# Altium PCB oscilloscope_ext.PcbDoc
Units mm, origin at the board's own origin, x right, y up, seen from the top; angles counter-clockwise.
Board outline 78 x 61 mm, 4 copper layers (Top Layer, Int1 (GND), Int2 (PWR), Bottom Layer), stack 1.585 mm thick; 61 components, 81 nets, 226 pads, 66 vias.
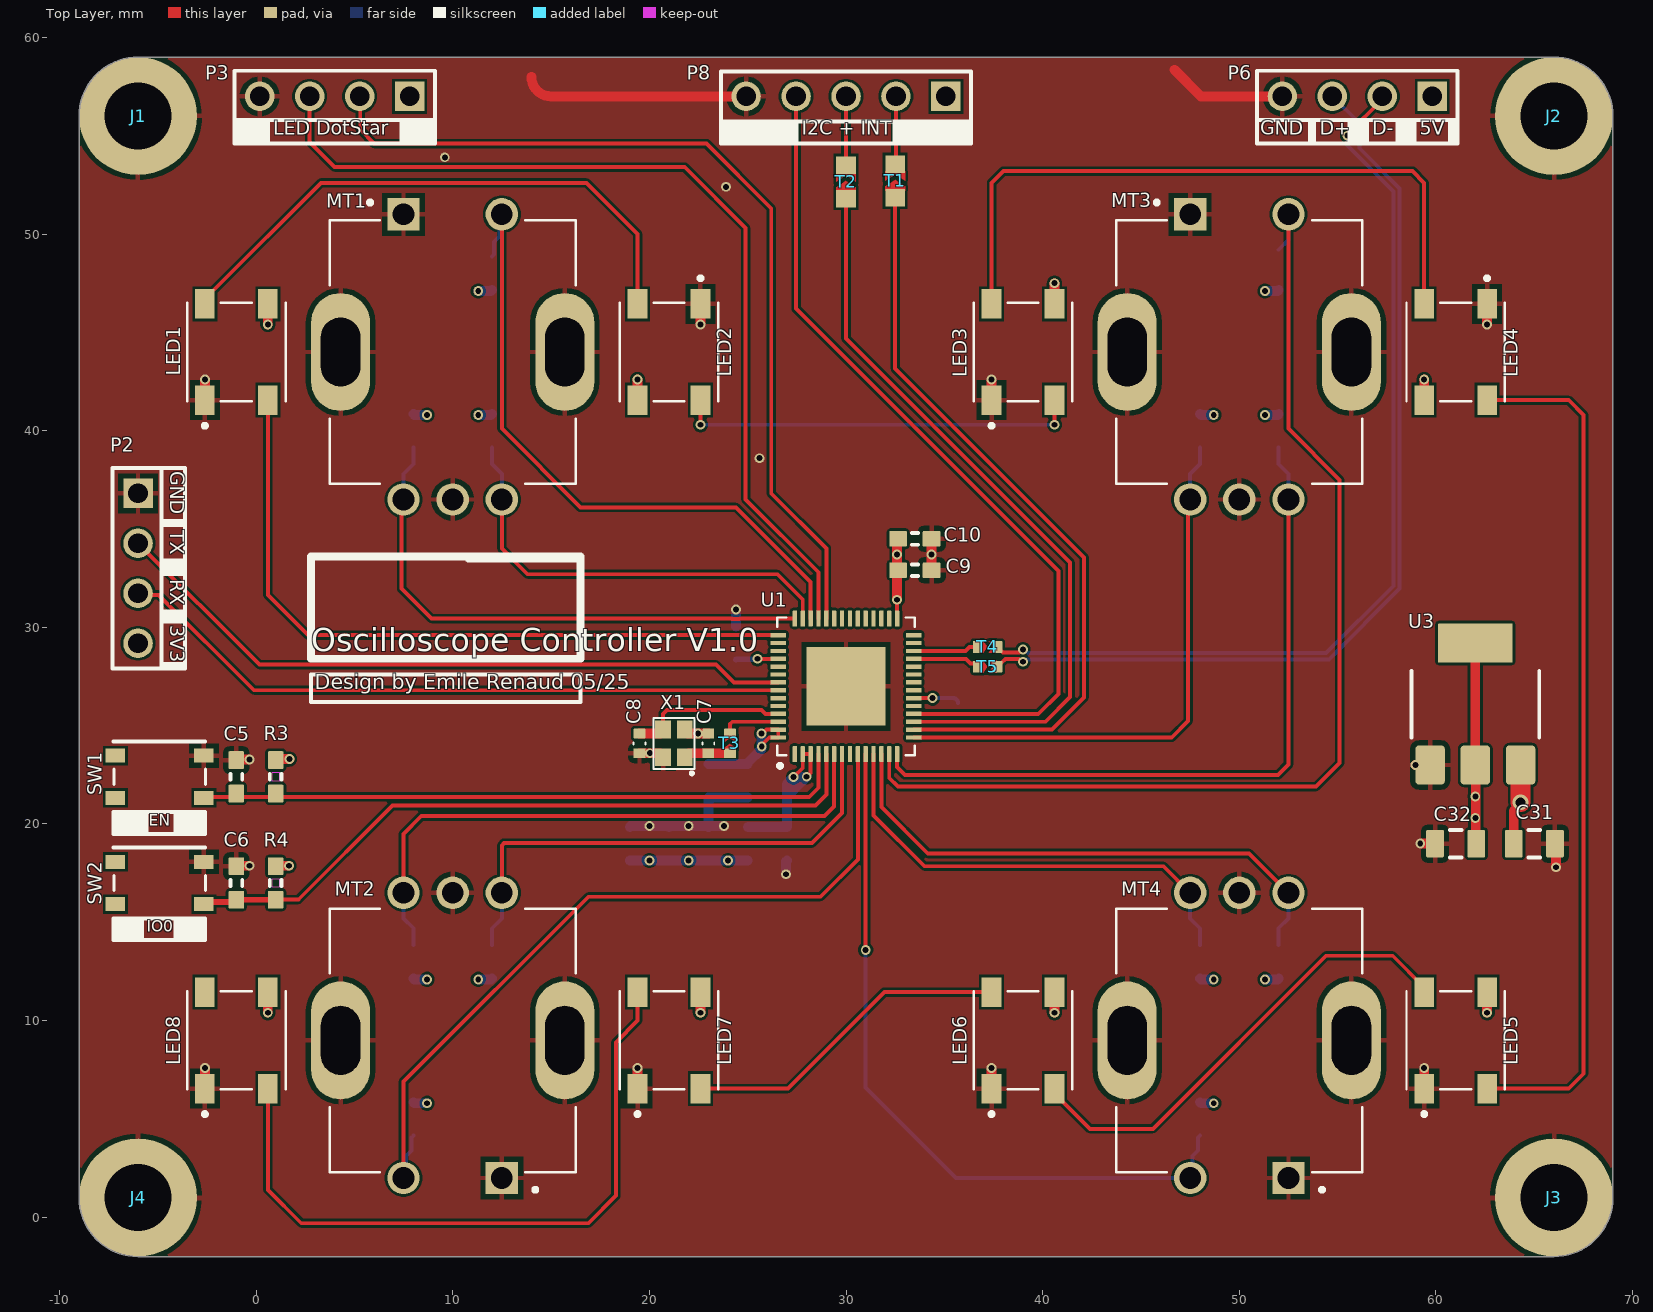
[diagram p0: Top Layer view]
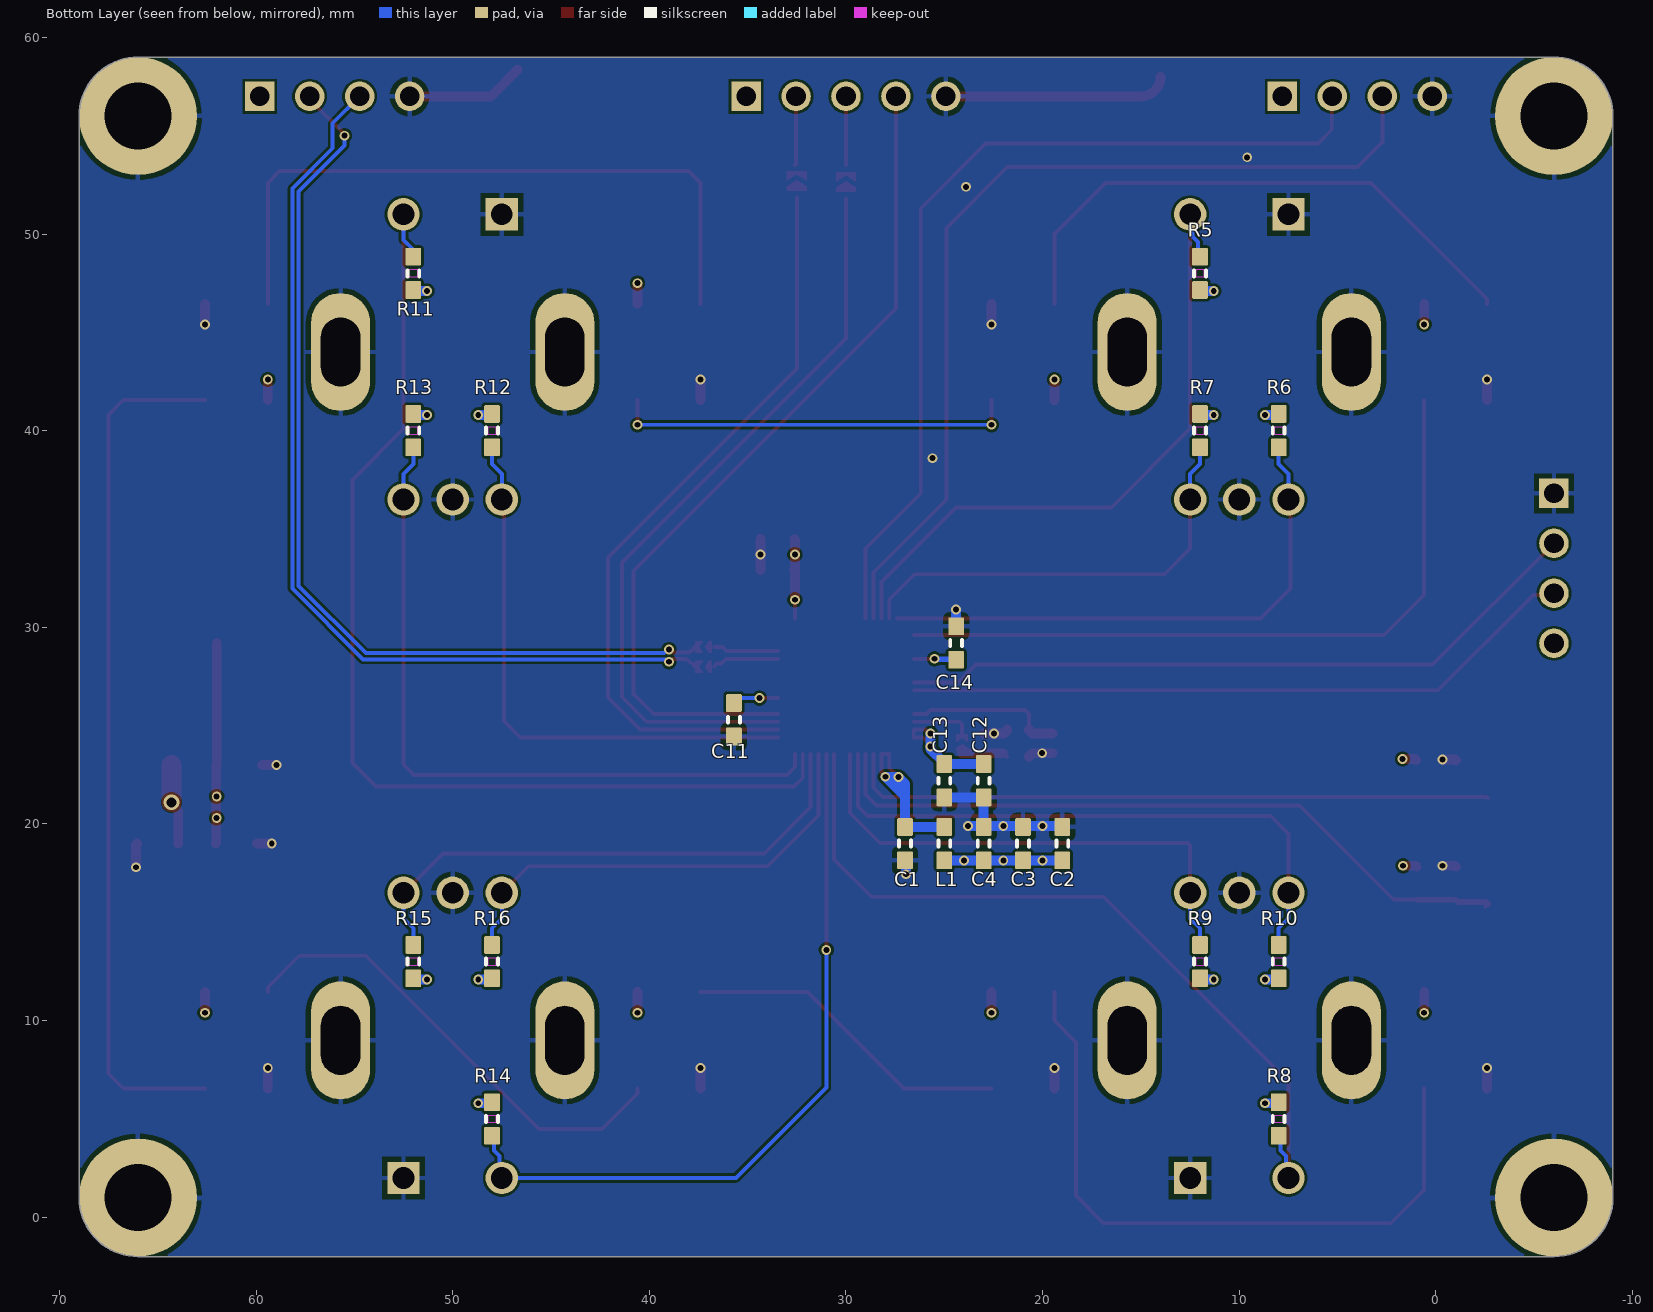
[diagram p1: Bottom Layer view, seen from below]
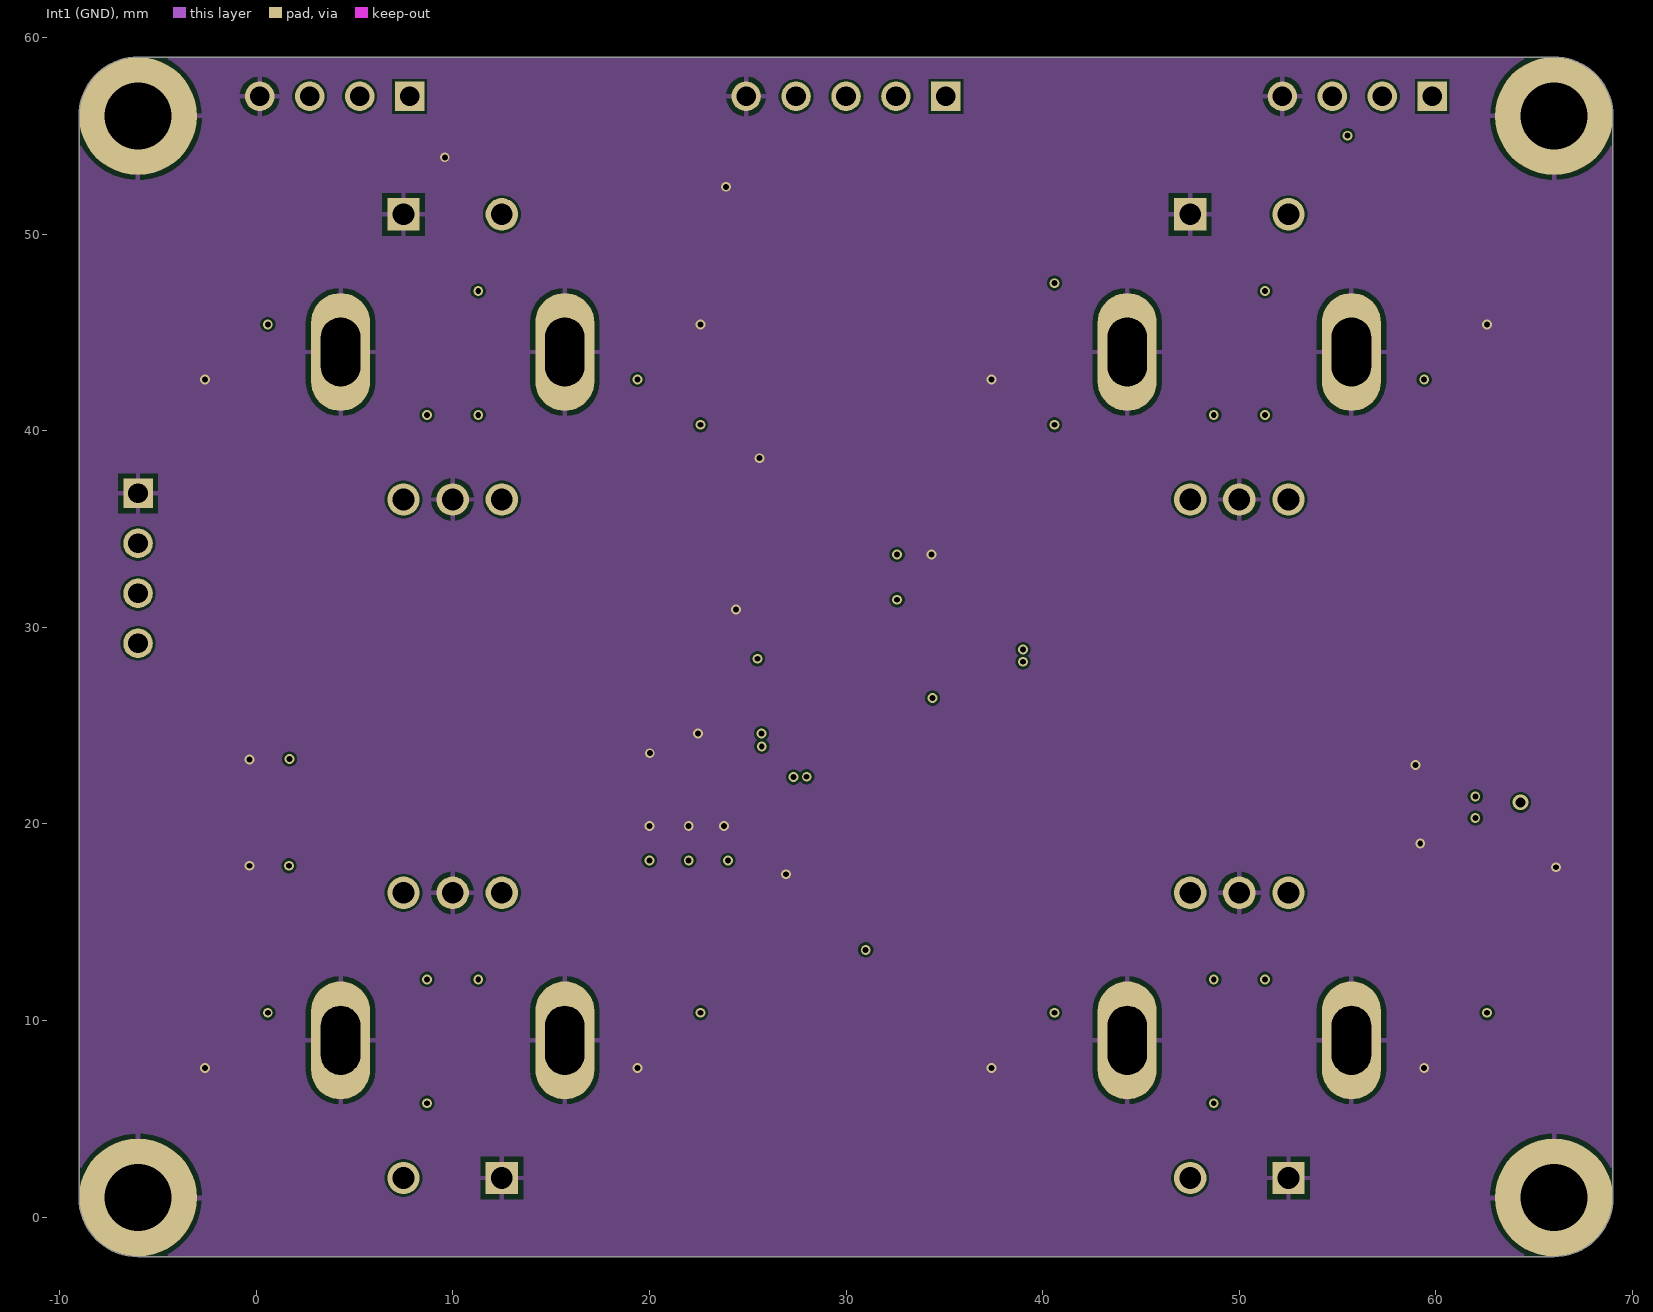
[diagram p2: Int1 (GND)]
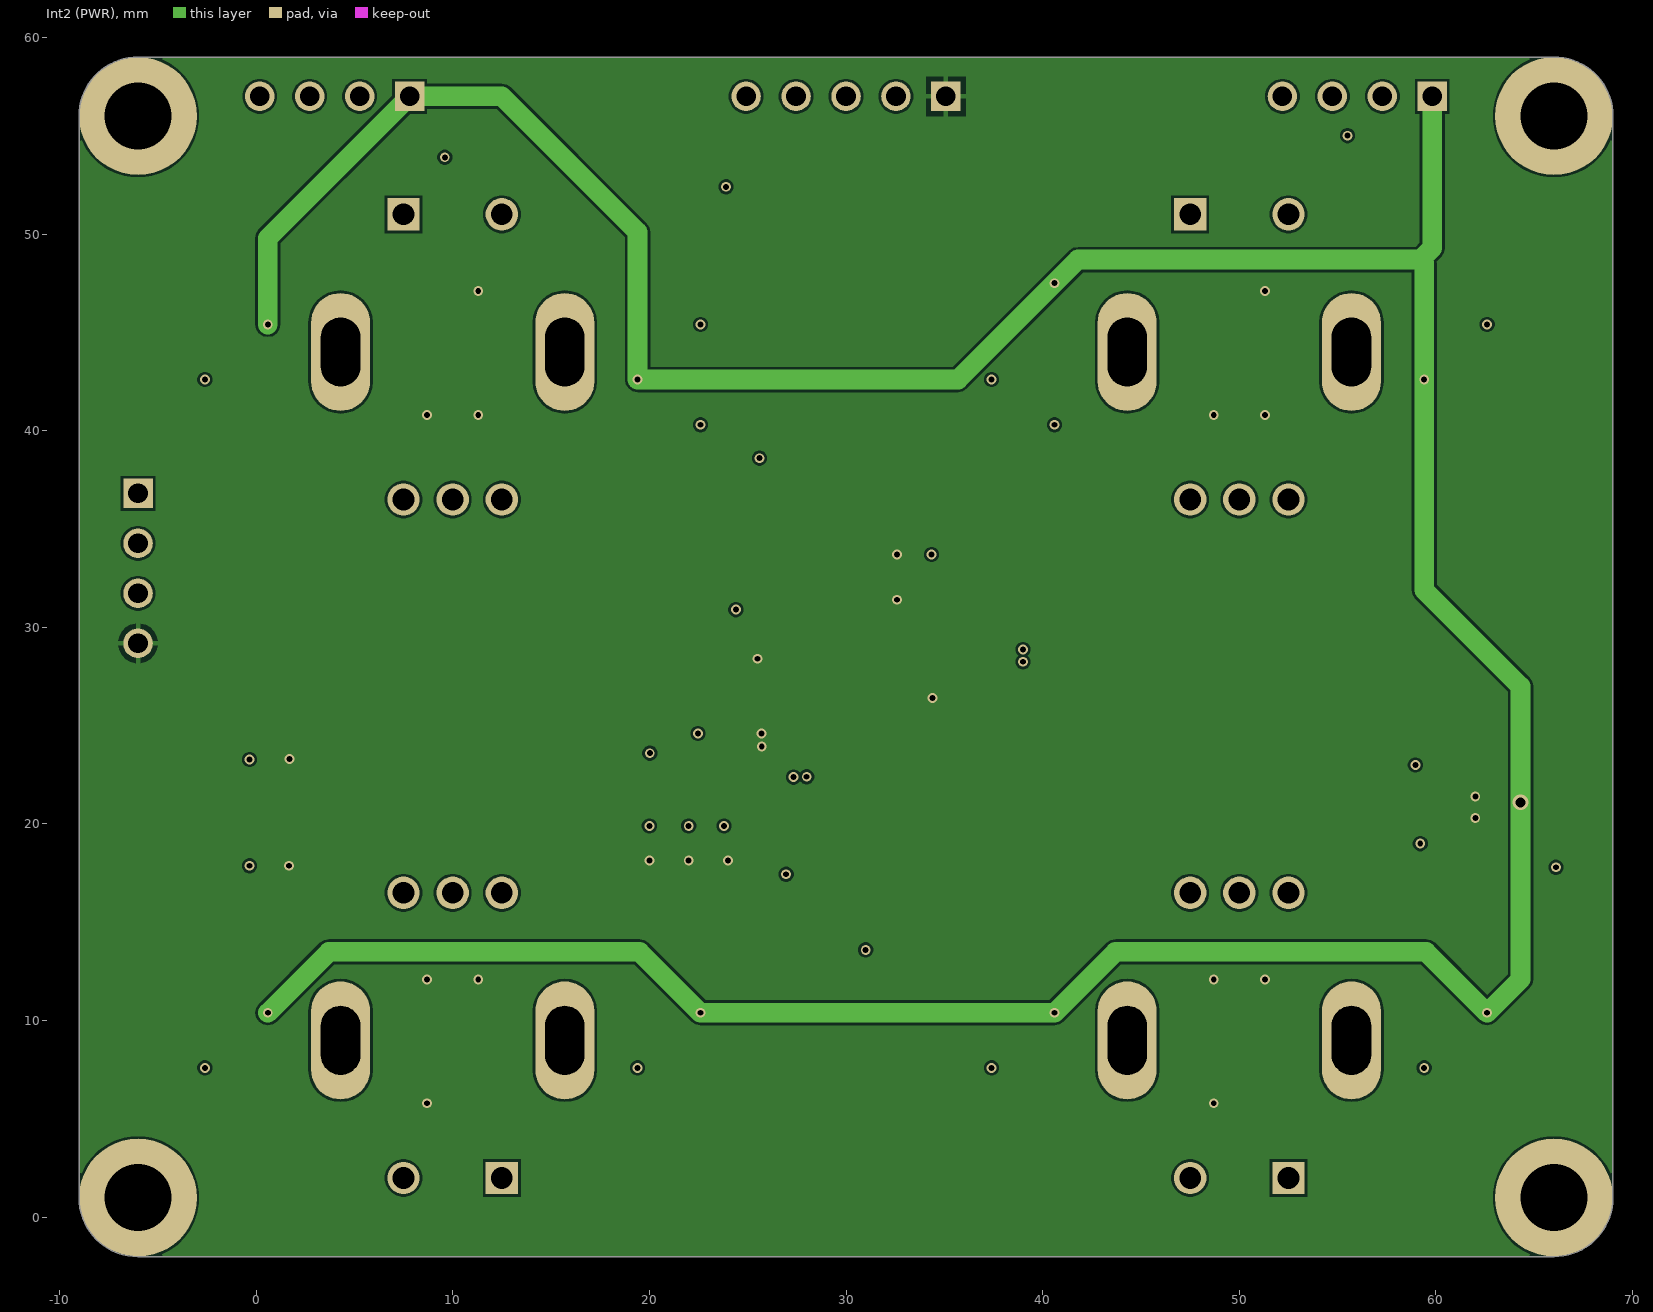
[diagram p3: Int2 (PWR)]
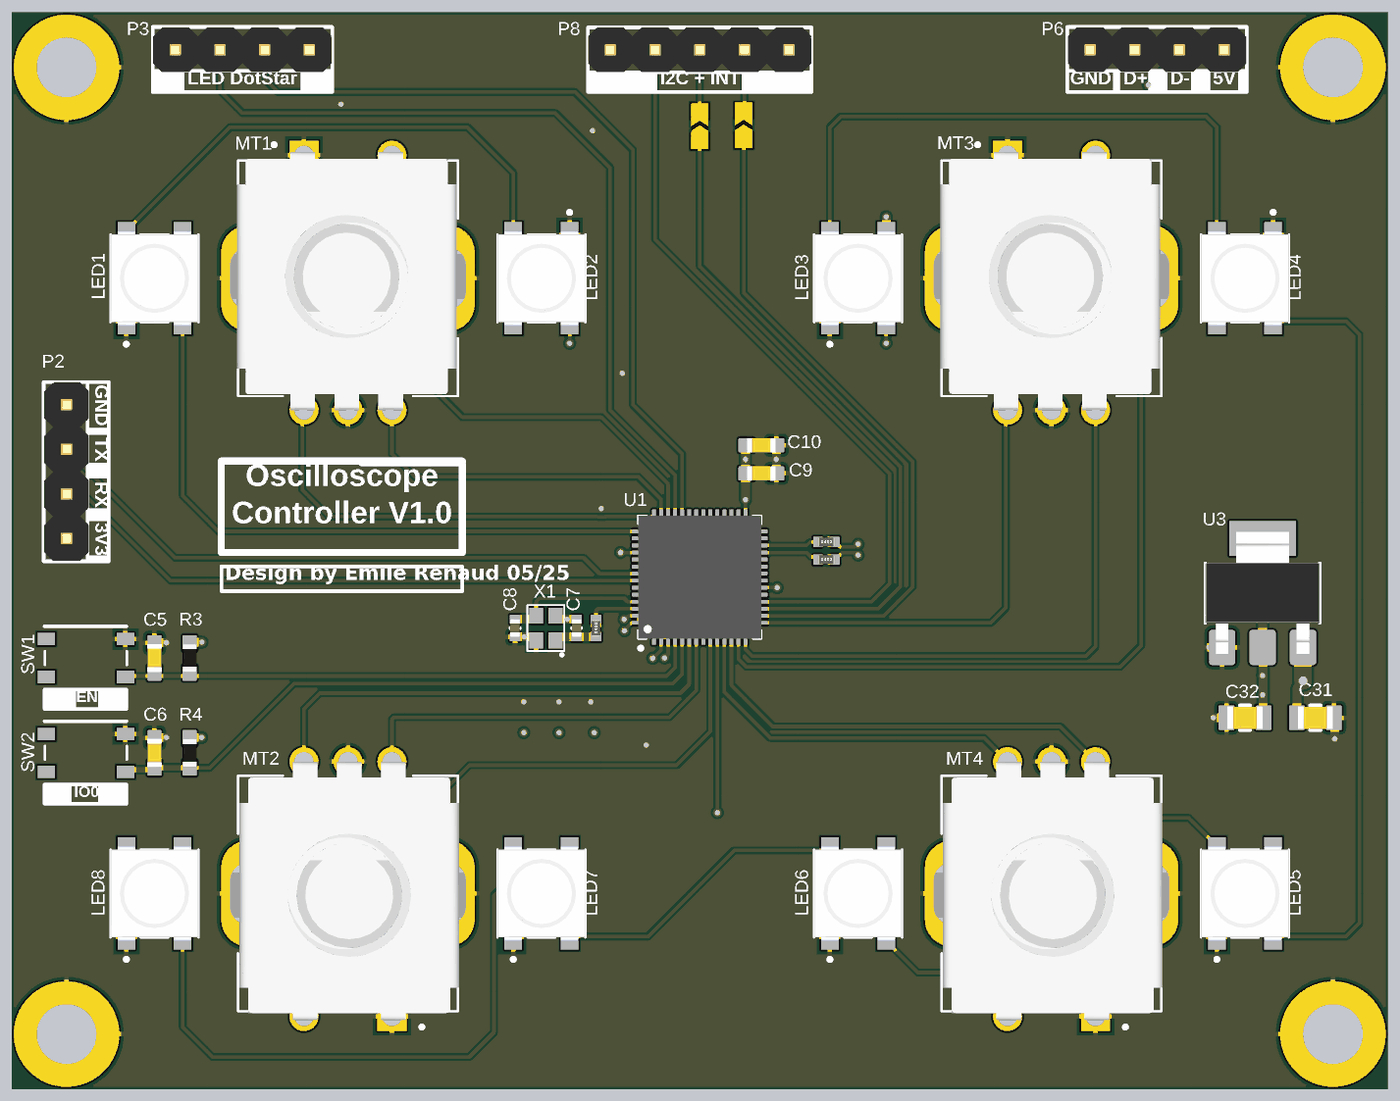
[diagram p4: 3D render of the assembled board from above, using the file's embedded part models]
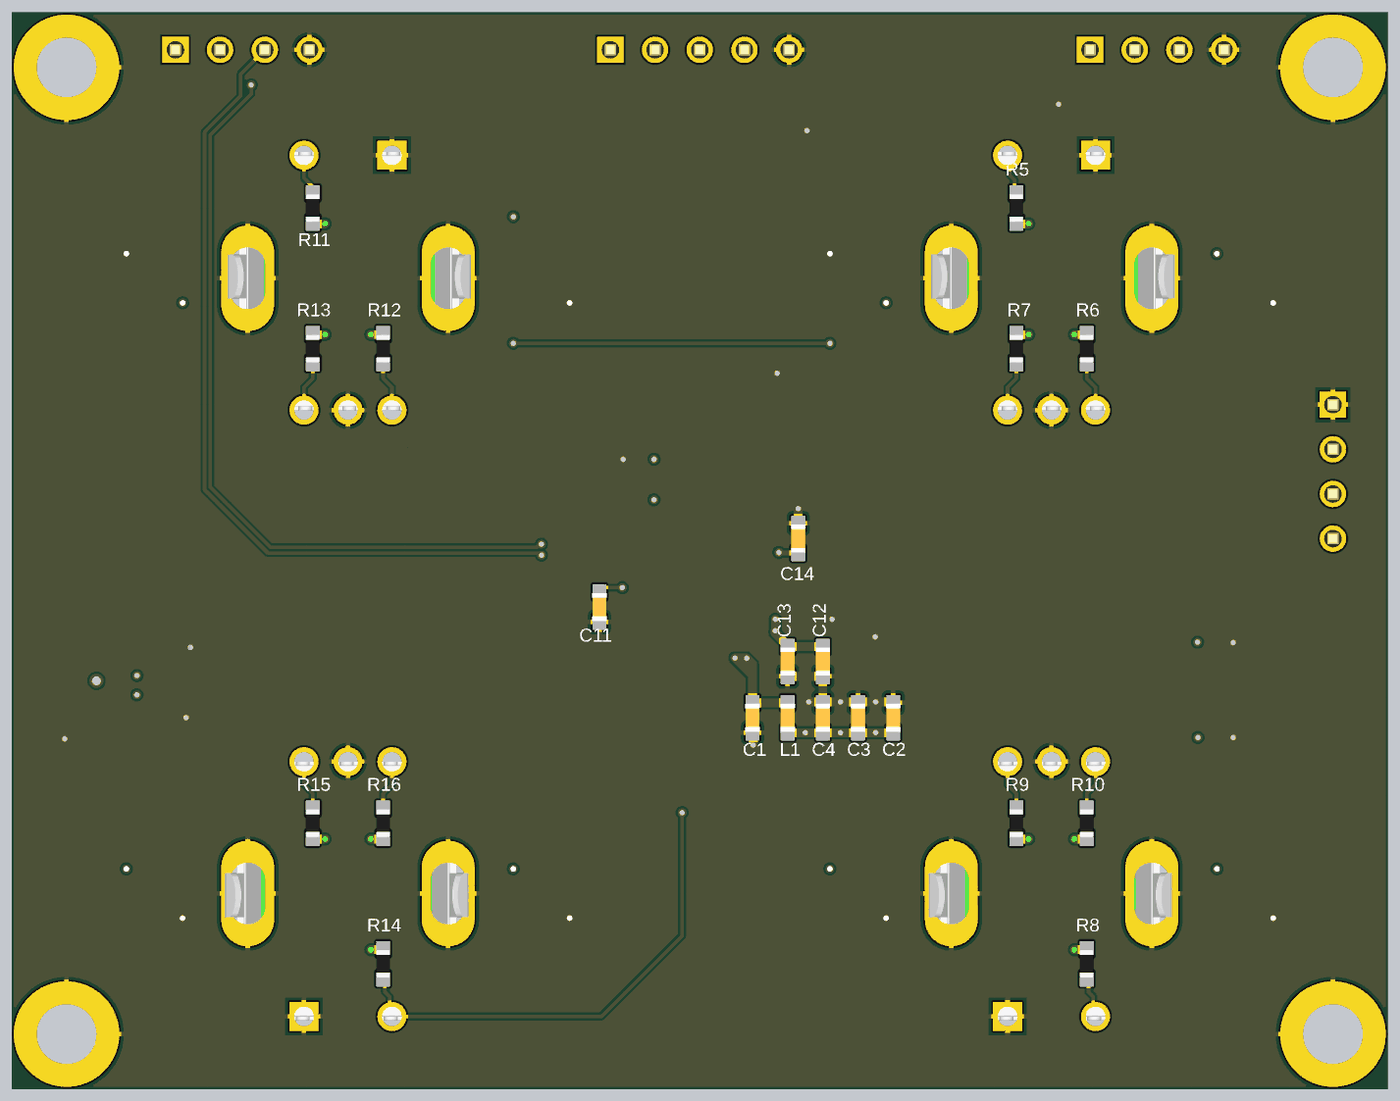
[diagram p5: 3D render of the assembled board from below, using the file's embedded part models]

## Layer stack, top to bottom
Top Solder: solder mask 0.035, SM-001, Dk 4
Top Layer: signal copper 0.035
Dielectric 2: prepreg 0.21, PP-017, Dk 4.6
Int1 (GND): signal copper 0.015
Dielectric 3: core 1.065, Core-039, Dk 4.6
Int2 (PWR): signal copper 0.015
Dielectric 4: prepreg 0.21, PP-017, Dk 4.6
Bottom Layer: signal copper 0.035
Bottom Solder: solder mask 0.035, SM-001, Dk 4

## Board outline
-9,1 -9,2 -9,53 -9,56 cw(c-6,56) -6,59 50,59 66,59 cw(c66,56) 69,56 69,1 cw(c66,1) 66,-2 65,-2 -6,-2 cw(c-6,1)

## Design rules (kind name [scope] priority, off if disabled: settings)
Clearance Clearance_Power [InNetClass('Power')] p1: gap=0.3 ignorepadtopadclearanceinfootprint=FALSE except(0.127: SMDPad-SMDPad SMDPad-THPad SMDPad-Via SMDPad-Fill SMDPad-Poly SMDPad-Region SMDPad-Text SMDPad-Hole THPad-THPad THPad-Via THPad-Fill THPad-Poly THPad-Region THPad-Text THPad-Hole)
Clearance Clearance_signal [All] p2: gap=0.125 ignorepadtopadclearanceinfootprint=FALSE
ComponentClearance [All] p1 off: gap=0.254 collisioncheckmode=3 verticalgap=0.254 showdistances=FALSE
DiffPairsRouting [InDifferentialPair('USB')] p1: maxlimit=0.254 minlimit=0.127 mostfreqgap=0.254 toplayer_maxgap=0.127 toplayer_prefgap=0.127 toplayer_minwidth=0.182 toplayer_maxwidth=0.182 toplayer_prefwidth=0.182 bottomlayer_maxgap=0.127 bottomlayer_prefgap=0.127 bottomlayer_minwidth=0.182 bottomlayer_maxwidth=0.182 bottomlayer_prefwidth=0.182 impedanceprofiledriven=TRUE impedanceprofileid={FA6609CF-BA32-4F74-B84B-CE5609EF71AF} impedanceprofilevalue=90.000000 maxuncoupledlength=12.7
HoleSize [All] p1 off: absolutevalues=TRUE maxlimit=2.54 minlimit=0.025 maxpercent=80.000 minpercent=20.000
MinimumSolderMaskSliver [All] p1 off: minsoldermaskwidth=0.254
PasteMaskExpansion [All] p1 off: expansion=0
PolygonConnect PolygonConnect_Power [InNetClass('Power')] p1: connectstyle=Direct reliefconductorwidth=0.254 reliefentries=4 polygonreliefangle="90 Angle" airgapwidth=0.254
PolygonConnect [All] p2: thpad.connectstyle=Relief thpad.reliefconductorwidth=0.254 thpad.reliefentries=4 thpad.polygonreliefangle="90 Angle" thpad.airgapwidth=0.254 smdpad.connectstyle=Relief smdpad.reliefconductorwidth=0.254 smdpad.reliefentries=4 smdpad.polygonreliefangle="90 Angle" smdpad.airgapwidth=0.254 via.connectstyle=Direct via.reliefconductorwidth=0.254 via.reliefentries=4 via.polygonreliefangle="90 Angle" via.airgapwidth=0.254
RoutingVias [All] p1: holewidth=0.3 width=0.5 viastyle="Through Hole" minholewidth=0.15 minwidth=0.25 maxholewidth=1 maxwidth=1.3
SilkToSolderMaskClearance [IsPad] p1 off: minsilkscreentomaskgap=0.254 clearancetoexposedcopper=TRUE
SolderMaskExpansion [All] p1 off: expansion=0.102 istentingtop=FALSE
Width Width_Power(5A) [InNetClass('Power')] p1: maxlimit=2 minlimit=0.5 preferedwidth=1.25 minimp=50.000000 maximp=50.000000 favimp=50.000000
Width Width_signal [All] p2: maxlimit=1 minlimit=0.1 preferedwidth=0.2 minimp=50.000000 maximp=50.000000 favimp=50.000000
24 further rules are at their usual default settings.

## Classes and differential pairs
differential pair class USB: USB USB-ESP
component class RotaryEncoder: LED1 LED2 LED3 LED4 LED5 LED6 LED7 LED8 MT1 MT2 MT3 MT4 R5 R6 R7 R8 R9 R10 R11 R12 R13 R14 R15 R16
component class CherryMX: P3 P8
component class MCU: C1 C2 C3 C4 C5 C6 C7 C8 C9 C10 C11 C12 C13 C14 C31 C32 J1 J2 J3 J4 L1 P2 P6 R3 R4 SW1 SW2 T1 T2 T3 T4 T5 U1 U3 X1
differential pair USB: +USB_P -USB_N
differential pair USB-ESP: +USB-ESP_P -USB-ESP_N

## Components (designator, comment, footprint, x,y, rotation, side; value= is the part's Value field where it differs from the comment)
C1 "Capacitor-0603-0.1uF-50V-X7R" CAPACITOR-0603 27,19 r90 bottom value=0.1uF
C2 "Capacitor-0603-0.1uF-50V-X7R" CAPACITOR-0603 19,19 r270 bottom value=0.1uF
C3 "Capacitor-0603-1uF-25V-X5R" CAPACITOR-0603 21,19 r270 bottom value=1uF
C4 "Capacitor-0603-10uF-6.3V-X5R" CAPACITOR-0603 23,19 r270 bottom value=10uF
C5 "Capacitor-0603-1uF-25V-X5R" CAPACITOR-0603 -1,22.4 r270 top value=1uF
C6 "Capacitor-0603-0.1uF-50V-X7R" CAPACITOR-0603 -1,17 r270 top value=0.1uF
C7 "Capacitor-0402-10pF-50V-C0G" CAPACITOR-0402 23,24.1 r270 top value=10pF
C8 "Capacitor-0402-10pF-50V-C0G" CAPACITOR-0402 19.5,24.1 r90 top value=10pF
C9 "Capacitor-0603-0.1uF-50V-X7R" CAPACITOR-0603 33.5,32.9 r180 top value=0.1uF
C10 "Capacitor-0603-1uF-25V-X5R" CAPACITOR-0603 33.5,34.5 r180 top value=1uF
C11 "Capacitor-0603-0.1uF-50V-X7R" CAPACITOR-0603 35.7,25.3 r90 bottom value=0.1uF
C12 "Capacitor-0603-0.1uF-50V-X7R" CAPACITOR-0603 23,22.2 r90 bottom value=0.1uF
C13 "Capacitor-0603-0.1uF-50V-X7R" CAPACITOR-0603 25,22.2 r90 bottom value=0.1uF
C14 "Capacitor-0603-1uF-25V-X5R" CAPACITOR-0603 24.4,29.2 r270 bottom value=1uF
C31 "Capacitor-0805-22uF-16V-X5R" CAPACITOR-0805 65,19 r180 top value=22uF
C32 "Capacitor-0805-22uF-16V-X5R" CAPACITOR-0805 61,19 r0 top value=22uF
J1 "hole" HOLE-3.40MM-M3-8MMEYELET -6,56 r0 top
J2 "hole" HOLE-3.40MM-M3-8MMEYELET 66,56 r0 top
J3 "hole" HOLE-3.40MM-M3-8MMEYELET 66,1 r0 top
J4 "hole" HOLE-3.40MM-M3-8MMEYELET -6,1 r0 top
L1 "2506036007Y3" CAPACITOR-0603 25,19 r270 bottom value=60R@100MHz
LED1 "1528-1104-ND" LED_NEO -1,44 r90 top
LED2 "1528-1104-ND" LED_NEO 21,44 r270 top
LED3 "1528-1104-ND" LED_NEO 39,44 r90 top
LED4 "1528-1104-ND" LED_NEO 61,44 r270 top
LED5 "1528-1104-ND" LED_NEO 61,9 r90 top
LED6 "1528-1104-ND" LED_NEO 39,9 r90 top
LED7 "1528-1104-ND" LED_NEO 21,9 r90 top
LED8 "1528-1104-ND" LED_NEO -1,9 r90 top
MT1 "Rotary Encoder" XDCR_PEC11R-4215F-S0024 10,44 r0 top locked
MT2 "Rotary Encoder" XDCR_PEC11R-4215F-S0024 10,9 r180 top locked
MT3 "Rotary Encoder" XDCR_PEC11R-4215F-S0024 50,44 r0 top locked
MT4 "Rotary Encoder" XDCR_PEC11R-4215F-S0024 50,9 r180 top locked
P2 "4pos-TH-2.54mm" HDR1X4 -6,33 r270 top
P3 "4pos-TH-2.54mm" HDR1X4 4,57 r180 top
P6 "4pos-TH-2.54mm" HDR1X4 56,57 r180 top
P8 "5pos-TH-2.54mm" HDR1X5 35.08,57 r180 top
R3 "SMT resistor" Resistor-0603 1,22.4 r90 top value=10k
R4 "SMT resistor" Resistor-0603 1,17 r90 top value=10k
R5 "SMT resistor" Resistor-0603 12,48 r270 bottom value=10k
R6 "SMT resistor" Resistor-0603 8,40 r90 bottom value=10k
R7 "SMT resistor" Resistor-0603 12,40 r90 bottom value=10k
R8 "SMT resistor" Resistor-0603 8,5 r90 bottom value=10k
R9 "SMT resistor" Resistor-0603 12,13 r270 bottom value=10k
R10 "SMT resistor" Resistor-0603 8,13 r270 bottom value=10k
R11 "SMT resistor" Resistor-0603 52,48 r270 bottom value=10k
R12 "SMT resistor" Resistor-0603 48,40 r90 bottom value=10k
R13 "SMT resistor" Resistor-0603 52,40 r90 bottom value=10k
R14 "SMT resistor" Resistor-0603 48,5 r90 bottom value=10k
R15 "SMT resistor" Resistor-0603 52,13 r270 bottom value=10k
R16 "SMT resistor" Resistor-0603 48,13 r270 bottom value=10k
SW1 "PTS815 SJM 250 SMTR LFS" "SW4_PTS815 SJM 250 SMTR LFS_CNK" -4.9,22.4 r270 top
SW2 "PTS815 SJM 250 SMTR LFS" "SW4_PTS815 SJM 250 SMTR LFS_CNK" -4.9,17 r270 top
T1 "NetTie_0603" NetTie-0603-short 32.5,52.7 r270 top
T2 "NetTie_0603" NetTie-0603-short 30,52.65 r270 top
T3 "NetTie_0402" NetTie-0402 24.1,24.1 r90 top
T4 "NetTie_0402" NetTie-0402 37.2,29 r0 top
T5 "NetTie_0402" NetTie-0402 37.2,28 r0 top
U1 "ESP32-S3FN8-SOC" "VFQFN-56 Exposed Pad" 30,27 r90 top
U3 "NCV1117ST33T3G" SOT-223-3/TO-261-3S 62,23 r0 top
X1 "CX2016DB40000D0FLJCC" 4-SMD 20.7,23.4 r90 top

## Footprints (in the part's own frame and the unit in brackets; to place one, negate y for a bottom-side part, rotate by r counter-clockwise, add the part's x,y. Pads: shape width x height; smd on the part's side, far side on the other; paste and mask are expansions set on the pad)
4-SMD [mm]
  rect 0.9x0.8 smd: 1(0,-1.1) 2(1.4,-1.1) 3(1.4,0) 4(0,0)
  silkscreen extent -0.87,-1.6 2,0.5
CAPACITOR-0402 [mm] "Metric 1005, EIA 0402. Per Yageo Product Specification V2.6"
  rrect15% 0.5x0.6 smd: 1(-0.5,0) 2(0.5,0)
  Top Layer pour cut-out: -0.3,0.25 0.3,0.25 0.3,-0.25 -0.3,-0.25
  silkscreen extent -0.05,-0.3 0.05,0.3, body extent -0.5,-0.27 0.5,0.28, height 0.51
CAPACITOR-0603 [mm] "Metric 1608, EIA 0603. Per Yageo Product Specification V2.2"
  rrect15% 0.9x0.8 smd: 1(-0.85,0) 2(0.85,0)
  Top Layer pour cut-out: -0.2,0.2 0.2,0.2 0.2,-0.2 -0.2,-0.2
  silkscreen extent -0.15,-0.3 0.15,0.3, body extent -0.93,-0.41 0.93,0.41, height 0.81
CAPACITOR-0805 [mm] "Metric 2012, EIA 0805, Per Yageo Product Specification V2.2"
  rrect15% 0.9x1.4 smd: 1(-1.05,0) 2(1.05,0)
  silkscreen extent -0.3,-0.7 0.3,0.7, body extent -1.09,-0.64 1.09,0.64, height 1.26
HDR1X4 [mm] "Connector; Header; 2 Position"
  rect 1.5x1.5 hole 1: 1(-3.81,0)
  round 1.5 hole 1: 2(-1.27,0) 3(1.27,0) 4(3.81,0)
  silkscreen extent -5.1,-1.3 5.1,1.2, body extent -5.08,-1.27 5.08,1.27, height 8.54
HDR1X5 [mm] "Connector; Header; 2 Position"
  rect 1.5x1.5 hole 1: 1(0,0)
  round 1.5 hole 1: 2(2.54,0) 3(5.08,0) 4(7.62,0) 5(10.16,0)
  silkscreen extent -1.27,-1.27 11.43,1.27, body extent -1.27,-1.27 11.43,1.27, height 8.54
HOLE-3.40MM-M3-8MMEYELET [mm] "Hole 3.40mm with round pad for eyelet"
  round 6 hole 3.4: 1(0,0)
LED_NEO [mm]
  rect 1.5x1 smd: 1(-2.45,1.6) 2(-2.45,-1.6) 3(2.45,-1.6) 4(2.45,1.6)
  silkscreen extent -3.85,-2.5 2.5,2.5, body extent -2.7,-2.5 2.7,2.5, height 1.5
NetTie-0402 [mm] "Metric 1005, EIA 0402 Drawn per Yageo \"Chip resistors Mounting\" rev 10"
  rrect15% 0.5x0.6 smd: 1(-0.5,0) 2(0.5,0)
  Top Layer region: 0.475,0.3 0.05,0.3 0.25,0 0.05,-0.3 0.375,-0.3 0.475,-0.3
  Top Layer region: -0.375,0.3 -0.225,0.3 -0.025,0 -0.225,-0.3 -0.375,-0.3
  body extent -0.51,-0.25 0.51,0.25, height 0.51
NetTie-0603-short [mm] "Net Tie with an EIA 0603 land pattern"
  rect 0.9x1 smd paste-1 mask+0.102: 1(-0.85,0) 2(0.85,0)
  Top Layer region: -0.5,0.5 0,0.5 -0.125,0.3 -0.325,0 -0.125,-0.3 0,-0.5 -0.5,-0.5
  Top Layer region: 0.5,0.5 0.275,0.5 0.15,0.3 -0.05,0 0.15,-0.3 0.275,-0.5 0.5,-0.5
Resistor-0603 [mm] "Metric 1608, EIA 0603 Drawn per Yageo \"Chip resistors Mounting\" rev 10"
  rrect15% 0.9x0.8 smd: 1(-0.85,0) 2(0.85,0)
  Top Layer pour cut-out: -0.2,0.2 0.2,0.2 0.2,-0.2 -0.2,-0.2
  Top Layer keep-out region: -0.2,-0.2 0.2,-0.2 0.2,0.2 -0.2,0.2
  silkscreen extent -0.15,-0.3 0.15,0.3, body extent -0.8,-0.4 0.8,0.4, height 0.55
SOT-223-3/TO-261-3S [mm] "TO-261-3 / SOT-223-3 from Infineon IPN80R600P7 Datasheet, rev 2,1"
  rrect25% 1.5x2 smd: 1(-2.3,0) 2(0,0) 3(2.3,0)
  rrect5% 3.8x2 smd: 4(0,6.2)
  silkscreen extent -3.25,1.4 3.25,4.78, body extent -3.25,-0.37 3.25,6.57, height 1.64
"SW4_PTS815 SJM 250 SMTR LFS_CNK" [mm]
  rect 0.711x0.991 smd paste+0: 1(1.075,2.25) 2(1.075,-2.25) 3(-1.075,2.25) 4(-1.075,-2.25)
  silkscreen extent -1.8,-2.35 1.8,2.32, body extent -1.83,-2.32 1.83,2.32, height 3
"VFQFN-56 Exposed Pad" [mm] "56-QFN (7x7) ESP32S3"
  rrect25% 0.81x0.22 smd: 1(-3.445,2.6) 2(-3.445,2.2) 3(-3.445,1.8) 4(-3.445,1.4) 5(-3.445,1) 6(-3.445,0.6) 7(-3.445,0.2) 8(-3.445,-0.2) 9(-3.445,-0.6) 10(-3.445,-1) 11(-3.445,-1.4) 12(-3.445,-1.8) 13(-3.445,-2.2) 14(-3.445,-2.6) 29(3.445,-2.6) 30(3.445,-2.2) 31(3.445,-1.8) 32(3.445,-1.4) 33(3.445,-1) 34(3.445,-0.6) 35(3.445,-0.2) 36(3.445,0.2) 37(3.445,0.6) 38(3.445,1) 39(3.445,1.4) 40(3.445,1.8) 41(3.445,2.2) 42(3.445,2.6)
  rrect25% 0.22x0.81 smd: 15(-2.6,-3.445) 16(-2.2,-3.445) 17(-1.8,-3.445) 18(-1.4,-3.445) 19(-1,-3.445) 20(-0.6,-3.445) 21(-0.2,-3.445) 22(0.2,-3.445) 23(0.6,-3.445) 24(1,-3.445) 25(1.4,-3.445) 26(1.8,-3.445) 27(2.2,-3.445) 28(2.6,-3.445) 43(2.6,3.445) 44(2.2,3.445) 45(1.8,3.445) 46(1.4,3.445) 47(1,3.445) 48(0.6,3.445) 49(0.2,3.445) 50(-0.2,3.445) 51(-0.6,3.445) 52(-1,3.445) 53(-1.4,3.445) 54(-1.8,3.445) 55(-2.2,3.445) 56(-2.6,3.445)
  rect 4x4 smd paste-3: 57(0,0)
  silkscreen extent -4.14,-3.5 3.5,3.5, body extent -3.5,-3.5 3.5,3.5, height 0.9
XDCR_PEC11R-4215F-S0024 [mm]
  rect 1.65x1.65 hole 1.1: 1(-2.5,7)
  round 1.65 hole 1.1: 2(2.5,7) A(-2.5,-7.5) B(2.5,-7.5) COM(0,-7.5)
  oval 3x6 hole 2 slot 3.5 at 90 deg: S1(-5.7,0) S2(5.7,0)
  silkscreen extent -6.25,-6.7 6.25,7.7, body extent -7,-7.5 6.85,7.2, height 21.5

## Part data
C1 C2 C6 C9 C11 C12 C13: Package / Case="Metric 1608, EIA 0603", Supplier Part Number 1=1276-1935-2-ND, Volt=50V, Mounted=Yes, Precision=X7R-10%, Supplier 1=Digi-Key, Supplier 2=Digi-Key, Supplier Part Number 2=1276-1934-2-ND
C3 C5 C10 C14: Package / Case="Metric 1608, EIA 0603", Supplier Part Number 1=1276-1859-2-ND, Volt=25V, Mounted=Yes, Precision=X5R-10%, Supplier 1=Digi-Key, Supplier 2=Digi-Key, Supplier Part Number 2=1276-1942-2-ND
  C5: Supplier 3=Digi-Key, Supplier 4=Digi-Key
C4: "Capacitor-0603-10uF-6.3V-X5R, Low ESR, Low ESL", Package / Case="Metric 1608 , EIA 0603", Supplier Part Number 1=NMC0603X5R106M6.3TRP4KF, Volt=6.3V, Mounted=Yes, Precision=X5R-20%, Supplier 1="Arrow Electronics"
C7 C8: Package / Case="0402 (1005 Metric)", Supplier Part Number 1=399-C0402C100K5GAC7867CT-ND, Volt=50V, HelpURL=https://connect.kemet.com:7667/gateway/IntelliData-ComponentDocumentation/1.0/download/datasheet/C0402C100K5GACTU, Mounted=Yes, Precision="C0G - 10%", Supplier 1=Digi-Key, Supplier 2=Digi-Key
C31 C32: Package / Case="Metric 2012 , EIA 0805", Supplier Part Number 1=1276-6780-1-ND, Volt=16V, Mounted=Yes, Precision=X5R-10%, Supplier 1=Digi-Key, Supplier 2=Digi-Key, Supplier 3=Digi-Key, Supplier 4=Digi-Key
J1 J2 J3 J4: library part "Hole 3.40mm M3-Eyelet", "Hole for M3 Bolt with 8mm pad", Mounted=N/A
L1: "60 Ohms @ 100 MHz 1 Signal Line Ferrite Bead 0603 (1608 Metric) 3A 40mOhm", Current=3A, Package / Case=SMD, Supplier Part Number 1=1934-1396-1-ND, Mounted=Yes, Supplier 1=Digi-Key
LED1 LED2 LED3 LED4 LED5 LED6 LED7 LED8: library part Led-NeoPixel, "LED RGB COMMON CATHODE (0.95(L)X", Package / Case=4-SMD, Mounted=Yes, Supplier 1=Digi-Key, Supplier Part Number 1=1528-1104-ND
MT1 MT2 MT3 MT4: library part PEC11R-4215F-S0024, "Incremental Encoder, 12 Mm, Contact Rating 10 Ma - 5 Vdc", Package=None, Availability=Unavailable, MP=PEC11R-4215F-S0024, Price=None
P2 P3 P6: "4pos TH 2.54mm Header", Package / Case=TH, Supplier Part Number 1=N/A, Mounted=Yes, Supplier 1=Digi-Key, Volt=N/A
P8: "5pos TH 2.54mm Header", Package / Case=TH, Supplier Part Number 1=N/A, Mounted=Yes, Supplier 1=Digi-Key, Volt=N/A
R3 R4 R5 R6 R7 R8 R9 R10 R11 R12 R13 R14 R15 R16: library part Resistor0603-10k, "Resistor0603-10k", Package / Case="Metric 1608, EIA 0603", Supplier Part Number 1=311-10.0KHRTR-ND, Mounted=Yes, Precision=1%, Supplier 1=Digi-Key, Supplier 2=Digi-Key, Supplier 3=Digi-Key, Supplier 4=Digi-Key, Supplier Part Number 2=RMCF0603FT10K0TR-ND, Watt=0.1W
SW1 SW2: "TACT 4.2 X 3.2, 2.5 MM H, 180GF,", Current=0.05A, Supplier Part Number 1=CKN12215-1-ND, Volt=12V, Mounted=Yes, Supplier 1=Digi-Key
U1: "IC RF TxRx + MCU Bluetooth, WiFi 802.11b/g/n, Bluetooth v5.0 2.412GHz ~ 2.484GHz 56-VFQFN Exposed Pad", Package="56-VFQFN Exposed Pad", Supplier Part Number 1=1965-ESP32-S3FN8-ND, Availability="In Stock", DigiKey Link=https://www.digikey.ca/en/products/detail/espressif-systems/ESP32-S3FN8/15822446, HelpURL=https://www.espressif.com/sites/default/files/documentation/esp32-s3_datasheet_en.pdf, MF="Espressif Systems", MP=ESP32-S3FN8, Supplier 1=Digikey
U3: "IC REG LINEAR 3.3V 1A SOT223", Package / Case=SOT223, Supplier Part Number 1=NCV1117ST33T3GOSCT-ND, Mounted=Yes, Supplier 1=Digi-Key
X1: "40 MHz ±10ppm Crystal 8pF 50 Ohms 4-SMD, No Lead", Supplier Part Number 1=478-CX2016DB40000D0FLJCCCT-ND, Supplier 1=Digikey

## Via types
v1: diameter 0.5, hole 0.3, Top Layer to Bottom Layer, tented both sides, 65 vias
v2: diameter 0.8, hole 0.5, Top Layer to Bottom Layer, tented both sides, 1 vias

## Nets (pads, with @x,y where several pads share a name; then routed paths per layer and width w, separated by ;. In a path a pad name is that pad's centre, name@x,y a point inside that pad or via, vN(x,y) a via of type N, cw(c..) or ccw(c..) an arc to the next point about the centre after c; other vN are vias at no path point)
3V3: C2.2 C3.2 C4.2 C9.2 C10.2 C11.2 C12.2 C13.2 C14.2 C32.2 L1.2 P2.4 P8.1 R3.2 R4.2 R5.2 R6.2 R7.2 R8.2 R9.2 R10.2 R11.2 R12.2 R13.2 R14.2 R15.2 R16.2 U1.20 U1.29 U1.46 U1.55 U1.56 U3.2 U3.4 | length 41.2
  Top Layer w0.2: v1(25.5,28.4) U1.46 ; v1(25.7,24.6) 25.756,24.6 25.956,24.8 U1.55 U1.56 26.545,24.39 26.096,24.39 25.716,24.01 v1(25.716,23.946) ; U1.29 v1(32.6,31.4) ; U1.20 v1(34.4,26.4)
  Top Layer w0.3: C10.2@32.625,34.475 C10.2
  Top Layer w0.5: R4.2@0.975,17.825 1.025,17.875 v1(1.675,17.875) ; R3.2 1.05,23.3 v1(1.7,23.3) ; v1(32.6,31.4) 32.6,32.85 C9.2 ; C9.2@32.625,32.9 32.6,32.925 v1(32.6,33.7) 32.6,34.45 C10.2@32.625,34.475 ; U3.4 U3.2 62.025,22.975 62.025,19.025 C32.2
  Bottom Layer w0.2: v1(34.4,26.4) 35.45,26.4 cw(c35.45,26.15) C11.2
  Bottom Layer w0.3: C14.2 24.425,28.375 25.475,28.375 v1(25.5,28.4)
  Bottom Layer w0.5: R8.2 8.05,5.8 v1(8.7,5.8) ; R10.2 8.05,12.1 v1(8.7,12.1) ; R6.2 8.05,40.8 v1(8.7,40.8) ; v1(11.3,12.1) 11.95,12.1 R9.2 ; v1(11.3,40.8) 11.95,40.8 R7.2 ; v1(11.3,47.1) 11.95,47.1 R5.2 ; C2.2 C3.2 C4.2 L1.2 ; C12.2 C13.2 25,23.1 25.716,23.816 v1(25.716,23.946) 25.7,23.963 v1(25.7,24.6) ; R14.2 48.05,5.8 v1(48.7,5.8) ; R16.2 48.05,12.1 v1(48.7,12.1) ; R12.2 48.05,40.8 v1(48.7,40.8) ; v1(51.3,12.1) 51.95,12.1 R15.2 ; v1(51.3,40.8) 51.95,40.8 R13.2 ; v1(51.3,47.1) 51.95,47.1 R11.2
  other v1: 20,18.15 22,18.15 24,18.15 62,20.3 62,21.4
3V3_SW: 
5V: C31.2 LED1.3 LED2.3 LED3.3 LED4.3 LED5.3 LED6.3 LED7.3 LED8.3 P3.1 P6.1 U3.3 | length 208.2
  Top Layer w0.5: v1(0.6,10.4) LED8.3 ; v1(0.6,45.4) LED1.3 ; LED2.3 v1(19.4,42.6) ; v1(22.6,10.4) LED7.3 ; v1(40.6,10.4) LED6.3 ; LED3.3 v1(40.6,47.5) ; LED4.3 v1(59.4,42.6) ; v1(62.6,10.4) LED5.3 ; C31.2 63.95,20.669 64.3,21.019 v2(64.3,21.1)
  Top Layer w1: v2(64.3,21.1) U3.3
  Int2 (PWR) w1: v1(0.6,45.4) 0.6,49.79 P3.1 12.5,57 19.4,50.1 v1(19.4,42.6) 35.7,42.6 41.8,48.7 59.224,48.7 ; v1@0.604,10.4 3.704,13.5 19.5,13.5 v1(22.6,10.4) v1(40.6,10.4) ; v1@40.604,10.4 43.704,13.5 59.5,13.5 v1(62.6,10.4) 64.3,12.1 v2(64.3,21.1) 64.3,27 59.4,31.9 v1(59.4,42.6) 59.4,48.524 59.224,48.7 ; P6.1 59.81,49.286 59.224,48.7
5V_USB: 
CC1: 
CC2: 
CO_LED: 
DO_LED: 
EN: C5.2 R3.1 SW1.1 U1.4 | length 33.2
  Top Layer w0.2: SW1.1 -2.6,21.375 -1,21.375 28.132,21.375 28.6,21.843 U1.4
GND: C1.1 C2.1 C3.1 C4.1 C5.1 C6.1 C7.1 C8.1 C9.1 C10.1 C11.1 C12.1 C13.1 C14.1 C31.1 C32.1 J1.1 J2.1 J3.1 J4.1 LED1.1 LED2.1 LED3.1 LED4.1 LED5.1 LED6.1 LED7.1 LED8.1 MT1.1 MT1.COM MT1.S1 MT1.S2 MT2.1 MT2.COM MT2.S1 MT2.S2 MT3.1 MT3.COM MT3.S1 MT3.S2 MT4.1 MT4.COM MT4.S1 MT4.S2 P2.1 P3.4 P6.4 P8.5 SW1.3 SW2.3 U1.57 U3.1 X1.2 X1.4 | length 44.3
  Top Layer w0.5: LED8.1 v1(-2.6,7.6) ; LED1.1 v1(-2.6,42.6) ; C6.1@-1.025,17.825 -0.975,17.875 v1(-0.325,17.875) ; C5.1@-1.025,23.225 -0.975,23.275 v1(-0.325,23.275) ; 14,58 ccw(c15,58) 15,57 P8.5 ; LED7.1 v1(19.4,7.6) ; C8.1 20.55,23.6 20.7,23.45 X1.4 ; X1.2 21.8,24.75 21.95,24.6 C7.1 ; v1(22.6,45.4) LED2.1 ; C9.1 C10.1 ; LED6.1 v1(37.4,7.6) ; LED3.1 v1(37.4,42.6) ; 46.7,58.353 48.053,57 P6.4 ; v1(58.95,23) U3.1 ; v1(59.2,19) C32.1 ; LED5.1 v1(59.4,7.6) ; v1(62.6,45.4) LED4.1 ; C31.1 66.1,18.95 v1(66.1,17.8)
  Bottom Layer w0.5: C2.1 19.05,19.9 v1(20,19.9) 20.95,19.9 C3.1 21.05,19.9 22.95,19.9 C4.1 ; v1(23.8,19.9) 23.05,19.9 C4.1 ; C14.1 v1(24.4,30.9) ; C13.1 C12.1 C4.1 ; v1(26.957,17.443) 26.957,18.107 C1.1
  other v1: 22,19.9 20.025,23.6 22.475,24.6 34.35,33.7 25.6,38.6 23.9,52.4 9.6,53.9
IO0: C6.2 R4.1 SW2.1 U1.5 | length 36.2
  Top Layer w0.2: SW2.1 SW2.1@-2.525,15.8 ; R4.1 2.15,16.15 6.938,20.938 28.438,20.938 29,21.5 U1.5
  Top Layer w0.3: SW2.1 -2.538,16.038 -1.112,16.038 C6.2 R4.1
IO1: MT2.B R10.1 U1.6 | length 31
  Top Layer w0.2: MT2.B 7.5,19.499 8.401,20.4 28.9,20.4 29.4,20.9 U1.6
  Bottom Layer w0.2: MT2.B 7.5,15.2 8,14.7 R10.1
IO2: MT2.A R9.1 U1.7 | length 26.2
  Top Layer w0.2: MT2.A 12.5,18.908 12.617,19.026 28.275,19.026 29.8,20.551 U1.7
  Bottom Layer w0.2: R9.1 12,14.7 12.5,15.2 MT2.A
IO4: MT2.2 R8.1 U1.9 | length 40.4
  Top Layer w0.2: MT2.2 7.5,6.9 16.9,16.3 28.7,16.3 30.6,18.2 U1.9
  Bottom Layer w0.2: MT2.2 7.625,2.125 7.625,3.125 7.9,3.4 7.9,4.05 R8.1
IO5: MT4.2 R14.1 U1.10 | length 37.7
  Top Layer w0.2: v1(31,13.6) 31,13.7 U1.10
  Bottom Layer w0.2: v1(31,13.6) 31,6.6 35.6,2 MT4.2 47.625,2.125 47.625,3.125 47.9,3.4 47.9,4.05 R14.1
IO6: MT4.B R16.1 U1.11 | length 23.7
  Top Layer w0.2: U1.11 31.4,20.443 33.99,17.853 46.147,17.853 MT4.B
  Bottom Layer w0.2: MT4.B 47.5,15.2 48,14.7 R16.1
IO7: MT4.A R15.1 U1.12 | length 28.1
  Top Layer w0.2: U1.12 31.8,20.855 34.155,18.5 50.5,18.5 MT4.A
  Bottom Layer w0.2: R15.1 52,14.7 52.5,15.2 MT4.A
IO8: MT3.2 R11.1 U1.13 | length 55.8
  Top Layer w0.2: U1.13 32.2,22.339 32.639,21.9 53.9,21.9 55.1,23.1 55.1,37.5 52.5,40.1 MT3.2
  Bottom Layer w0.2: R11.1@52,49.2 52.5,49.7 MT3.2
IO9: MT3.B R13.1 U1.14 | length 37.3
  Top Layer w0.2: U1.14 32.6,22.89 32.99,22.5 51.965,22.5 52.5,23.035 MT3.B
  Bottom Layer w0.2: R13.1 52,38.3 52.5,37.8 MT3.B
IO10: MT3.A R12.1 U1.15 | length 28.5
  Top Layer w0.2: U1.15 46.562,24.4 47.4,25.238 47.4,36.4 MT3.A
  Bottom Layer w0.2: MT3.A 47.5,37.8 48,38.3 R12.1
IO11: T1.2 U1.16 | length 38.7
  Top Layer w0.2: T1.2 32.5,43.162 42.11,33.552 42.11,26.441 40.469,24.8 U1.16
IO12: T2.2 U1.17 | length 38.5
  Top Layer w0.2: T2.2 30,44.691 41.4,33.291 41.4,26.456 40.144,25.2 U1.17
IO13: P8.4 U1.18 | length 43.7
  Top Layer w0.2: P8.4 27.46,46.209 40.796,32.873 40.796,26.619 39.777,25.6 U1.18
IO14: U1.19
IO17: U1.23
IO18: U1.24
IO21: U1.27
IO33: P3.2 U1.38 | length 46.3
  Top Layer w0.2: P3.2 5.3,56.97 5.3,55.3 6,54.6 22.9,54.6 26.2,51.3 26.2,36.8 29,34 U1.38
IO34: P3.3 U1.39 | length 47.7
  Top Layer w0.2: P3.3 2.73,54.67 4,53.4 21.8,53.4 24.9,50.3 24.9,36.5 28.6,32.8 U1.39
IO35: MT1.2 R5.1 U1.40 | length 34
  Top Layer w0.2: MT1.2 12.5,40.1 16.5,36.1 24.4,36.1 28.2,32.3 U1.40
  Bottom Layer w0.2: R5.1 12.1,48.95 12.1,49.6 12.375,49.875 12.375,50.875 MT1.2
IO36: MT1.B R7.1 U1.41 | length 22.7
  Top Layer w0.2: MT1.B 12.5,34.011 13.811,32.7 26.512,32.7 27.8,31.412 U1.41
  Bottom Layer w0.2: R7.1 12,38.3 12.5,37.8 MT1.B
IO37: MT1.A R6.1 U1.42 | length 28.1
  Top Layer w0.2: MT1.A 7.4,36.4 7.4,31.973 8.928,30.445 24.183,30.445 24.203,30.425 24.597,30.425 24.617,30.445 U1.42
  Bottom Layer w0.2: MT1.A 7.5,37.8 8,38.3 R6.1
IO38: LED1.2 U1.43 | length 36.7
  Top Layer w0.2: LED1.2 0.6,31.635 2.635,29.6 U1.43
NetC1_2: C1.2 L1.1 U1.2 U1.3 | length 9.8
  Top Layer w0.2: v1(27.329,22.383) 27.8,22.854 U1.2 U1.3 28.2,22.6 v1(28,22.4)
  Bottom Layer w0.5: L1.1 C1.2 27,21.087 27,21.404 v1@27.995,22.399 ; 26.996,21.404 26.996,22.05 27.346,22.4 v1(28,22.4)
NetC7_2: C7.2 T3.1 X1.1 | length 2.4
  Top Layer w0.2: X1.1 X1.1@22,23.6
  Top Layer w0.5: X1.1@22,23.6 C7.2 T3.1
NetC8_2: C8.2 U1.53 X1.3 | length 8.1
  Top Layer w0.2: X1.3 20.7,25.6 20.9,25.8 25.7,25.8 25.9,25.6 U1.53
  Top Layer w0.5: C8.2 20.55,24.6 20.7,24.75 X1.3
NetLED1_4: LED1.4 LED2.2 | length 29.3
  Top Layer w0.2: LED1.4 -2.6,46.7 -2.225,47.075 3.3,52.6 16.8,52.6 19.4,50 LED2.2
NetLED2_4: LED2.4 LED3.2 | length 20.5
  Top Layer w0.2: v1(22.6,40.3) LED2.4 ; v1(40.6,40.3) LED3.2
  Bottom Layer w0.2: v1(22.6,40.3) v1(40.6,40.3)
NetLED3_4: LED3.4 LED4.2 | length 34.8
  Top Layer w0.2: LED3.4 37.4,52.6 38,53.2 58.8,53.2 59.4,52.6 LED4.2
NetLED4_4: LED4.4 LED5.2 | length 43.9
  Top Layer w0.2: LED5.2 66.75,6.55 67.5,7.3 67.5,40.8 66.75,41.55 LED4.4
NetLED5_4: LED5.4 LED6.2 | length 24.4
  Top Layer w0.2: LED6.2 40.6,6.3 41,5.9 42.4,4.5 45.6,4.5 54.4,13.3 57.8,13.3 59.4,11.7 LED5.4
NetLED6_4: LED6.4 LED7.2 | length 16.8
  Top Layer w0.2: LED7.2 27.05,6.55 31.95,11.45 LED6.4
NetLED7_4: LED7.4 LED8.2 | length 34.9
  Top Layer w0.2: LED8.2 0.6,1.4 2.3,-0.3 16.9,-0.3 18.3,1.1 18.3,8.9 19.4,10 LED7.4
NetLED9_4: 
NetLED9_5: 
NetLED9_7: 
NetLED9_8: 
NetLED10_7: 
NetLED10_8: 
NetLED11_7: 
NetLED11_8: 
NetLED13_7: 
NetLED13_8: 
NetLED14_7: 
NetLED14_8: 
NetLED15_7: 
NetLED15_8: 
NetP7_2: 
NetP7_3: 
NetP7_4: 
NetP8_2: P8.2 T1.1 | length 3.5
  Top Layer w0.2: P8.2 32.54,53.56 T1.1@32.6,53.5
NetP8_3: P8.3 T2.1 | length 3.5
  Top Layer w0.2: T2.1 P8.3
NetR21_1: 
NetT3_2: T3.2 U1.54 | length 3
  Top Layer w0.2: T3.2 24.1,25.083 24.217,25.2 U1.54
NetT4_1: T4.1 U1.26 | length 3.3
  Top Layer w0.185: U1.26 36.074,28.8 36.274,29 T4.1
NetT5_1: T5.1 U1.25 | length 3.4
  Top Layer w0.2: U1.25 36.091,28.4 36.341,28.151 36.55,28.151 T5.1
NetT6_2: 
RX0: P2.3 U1.50 | length 34.6
  Top Layer w0.2: P2.3 -5.92,31.65 -4.95,31.65 -0.1,26.8 U1.50
SW1: 
SW2: 
SW3: 
SW4: 
SW5: 
SW6: 
SW7: 
SW8: 
TX0: P2.2 U1.49 | length 35.5
  Top Layer w0.2: P2.2 0.17,28.1 23.4,28.1 24.3,27.2 U1.49
USB-ESP_N: P6.3 T5.2 | length 48.7
  Top Layer w0.2: T5.2 37.7,28.05 37.85,28.2 37.9,28.2 38.1,28.4 38.8,28.4 38.952,28.248 v1(38.999,28.248)
  Bottom Layer w0.2: v1(38.999,28.248) 39.079,28.248 39.2,28.369 54.552,28.369 58.154,31.971 58.154,52.306 56.1,54.36 56.1,55.63 P6.3
USB-ESP_P: P6.2 T4.2 | length 48.4
  Top Layer w0.2: T4.2 37.7,28.95 37.85,28.8 37.9,28.8 37.975,28.725 38.8,28.725 38.95,28.875 v1(39,28.875) ; v1(55.5,55) 55.5,55.081 57.27,56.851 P6.2
  Bottom Layer w0.2: v1@39,28.856 39.1,28.856 39.262,28.694 54.417,28.694 57.829,32.106 57.829,52.171 55.5,54.5 v1(55.5,55)
USB_N: 
USB_P: 
pads on no net: LED8.4 SW1.2 SW1.4 SW2.2 SW2.4 U1.1 U1.8 U1.21 U1.22 U1.28 U1.30 U1.31 U1.32 U1.33 U1.34 U1.35 U1.36 U1.37 U1.44 U1.45 U1.47 U1.48 U1.51 U1.52

## Polygon pours and split planes (outlines as drawn)
3V3 on Int2 (PWR) "3V3_L03_P008" (solid, remove dead copper, pour order 8): 69,0.54 cw(c66.46,0.54) 66.46,-2 -6.46,-2 cw(c-6.46,0.54) -9,0.54 -9,56.46 cw(c-6.46,56.46) -6.46,59 66.46,59 cw(c66.46,56.46) 69,56.46 69,50
GND on Bottom Layer "GND_L04_P010" (solid, remove dead copper, pour order 10): 69,0.54 cw(c66.46,0.54) 66.46,-2 -6.46,-2 cw(c-6.46,0.54) -9,0.54 -9,56.46 cw(c-6.46,56.46) -6.46,59 66.46,59 cw(c66.46,56.46) 69,56.46 69,51
GND on Int1 (GND) "GND_L02_P007" (solid, remove dead copper, pour order 7): 66.46,59 cw(c66.46,56.46) 69,56.46 69,0.54 cw(c66.46,0.54) 66.46,-2 -6.46,-2 cw(c-6.46,0.54) -9,0.54 -9,56.46 cw(c-6.46,56.46) -6.46,59 -3,59
GND on Top Layer "GND_L01_P009" (solid, remove dead copper, pour order 9): 69,0.54 cw(c66.46,0.54) 66.46,-2 -6.46,-2 cw(c-6.46,0.54) -9,0.54 -9,56.46 cw(c-6.46,56.46) -6.46,59 66.46,59 cw(c66.46,56.46) 69,56.46 69,51

## Silkscreen, mask and mechanical layers (free items; w line width, h text height)
Top Overlay:
  rectangle: 7.3,54.6 9.1,55.8
  rectangle: -1.1,54.6 0.7,55.8
  rectangle: 23.695,54.685 27.591,55.693
  rectangle: 32.376,54.6 36.35,55.704
  rectangle: 60.614,54.6 61.1,55.77
  rectangle: 53.5,54.6 53.9,55.8
  rectangle: 55.5,54.6 56.585,55.8
  rectangle: 57.931,54.6 59.02,55.8
  region: -4.8,35.5 -4.8,35.1 -3.6,35.1 -3.6,35.5
  region: -4.8,33.5 -4.8,32.6 -3.6,32.6 -3.6,33.5
  region: -4.8,30.9 -4.8,30.2 -3.6,30.2 -3.6,30.9
  rectangle: -7.248,14.1 -5.7,15.2
  rectangle: -4.2,14.1 -2.6,15.2
  rectangle: -7.248,19.5 -5.474,20.6
  rectangle: -4.2,19.5 -2.6,20.6
  lines w0.2: -7.248,15.2 -7.248,14.1 -3.7,14.1 -2.6,14.1 -2.6,15.2 ; -7.248,20.6 -7.248,19.5 -3.7,19.5 -2.6,19.5 -2.6,20.6 ; -5.3,38.1 -3.6,38.1 -3.6,27.9 -4.9,27.9 ; -1.1,57.05 -1.1,54.6 9.1,54.6 9.1,57 ; 23.65,57 23.65,54.6 35.8,54.6 36.35,54.6 36.35,57 ; 50.9,56.3 50.9,54.6 61.1,54.6 61.1,55.9 ; 2.8,26.2 2.8,27.6 13.5,27.6 16.5,27.6 16.5,26.2 2.8,26.2
  lines w0.25: -4.7,28.1 -3.7,28.1
  lines w0.4: 10.8,33.5 16.5,33.5 16.5,28.4 2.8,28.4 2.8,33.6 16.5,33.6 16.5,33.4
  text "5V" at 59.18,54.823 h1.2
  text "LED DotStar" at 0.882,54.817 h1.2
  text "I2C + INT" at 27.742,54.817 h1.2
  text "GND" at 51.053,54.817 h1.2
  text "D+" at 54.092,54.817 h1.2
  text "D-" at 56.748,54.817 h1.2
  text "GND" at -4.583,37.947 h1.2 r270
  text "TX" at -4.583,34.941 h1.2 r270
  text "RX" at -4.583,32.433 h1.2 r270
  text "3V3" at -4.578,30.099 h1.2 r270
  text "Oscilloscope Controller V1.0" at 2.812,28.403 h2
  text "Design by Emile Renaud 05/25" at 2.99,26.607 h1.3
  text "EN" at -5.452,19.711 h1
  text "IO0" at -5.568,14.312 h1
Board:
  lines w0.25: -9,2 ccw(c-9,2) -9,2 ; -9,2 -9,53 -9,56 cw(c-6,56) -6,59 50,59 66,59 cw(c66,56) 69,56 69,51 69,1 cw(c66,1) 66,-2 65,-2 -6,-2 cw(c-6,1) -9,1 -9,2